# Altium PCB NANO-PCB.PcbDoc
Units mil, origin at the board's own origin, x right, y up, seen from the top; angles counter-clockwise.
Board outline 699.21 x 1699.21 mil, 4 copper layers (L1, L2, L3, L4), stack 61.585 mil thick; 26 components, 42 nets, 156 pads, 36 vias.
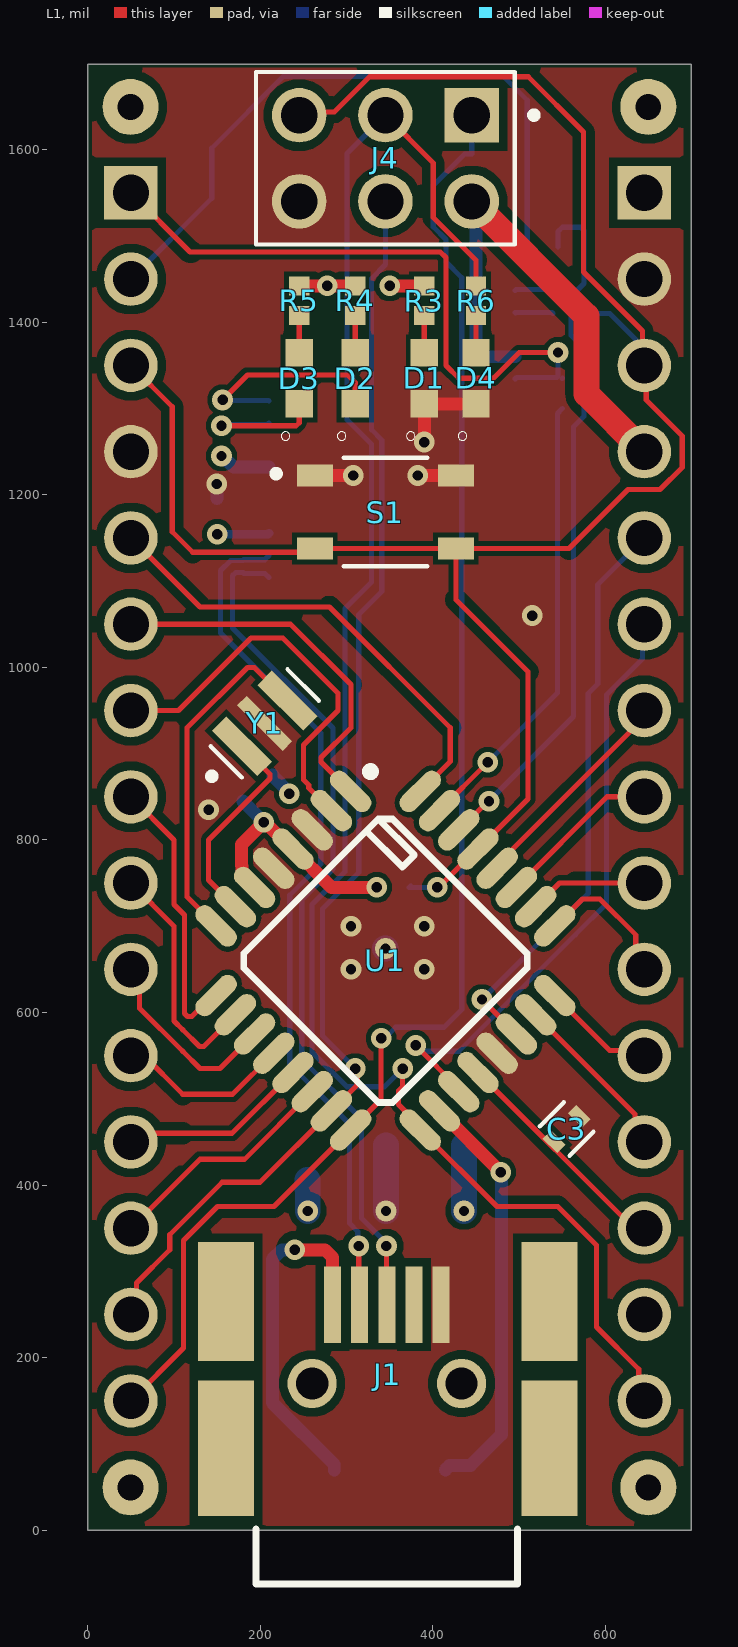
[diagram p0: L1 view]
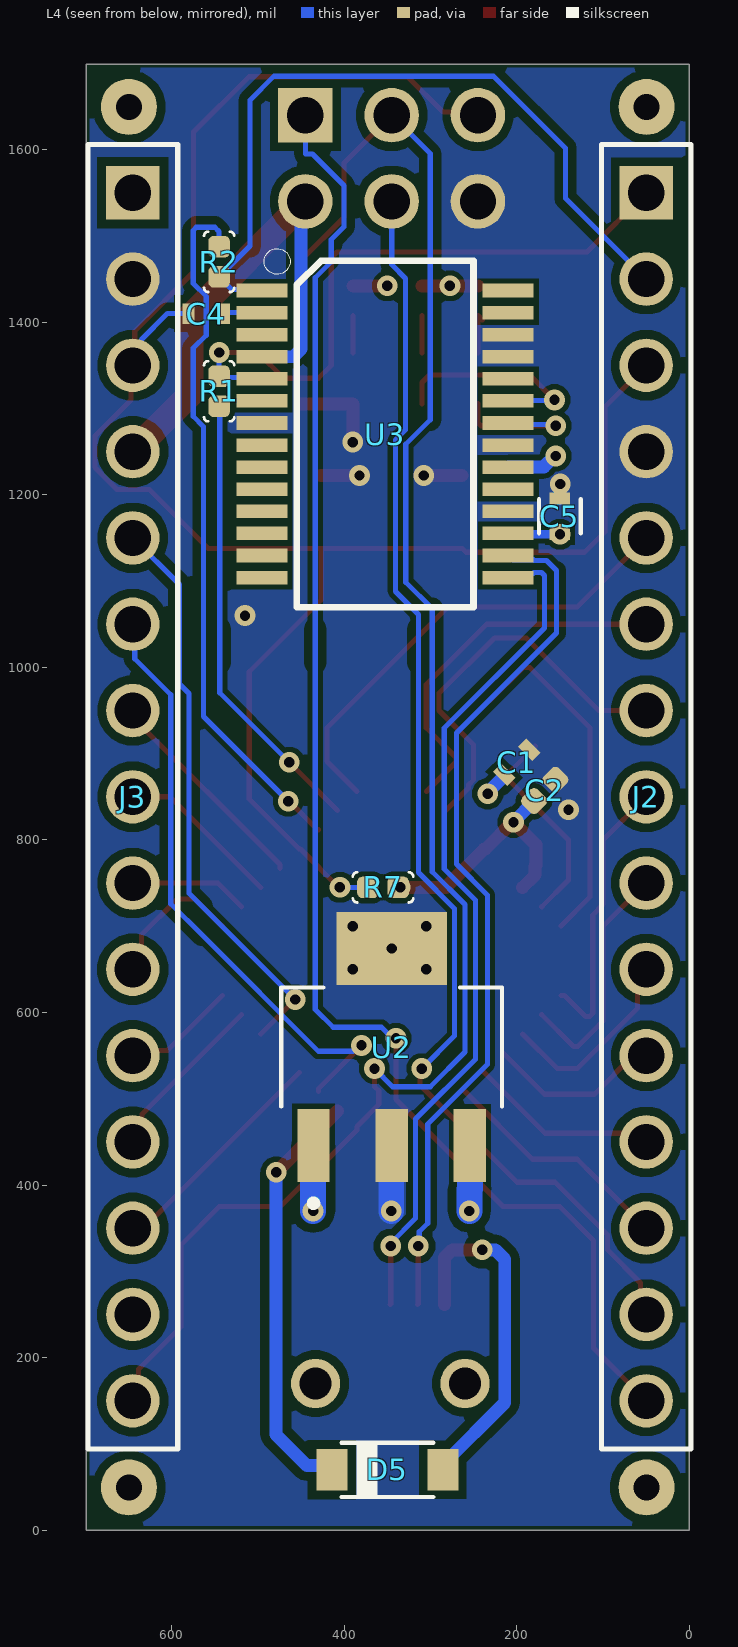
[diagram p1: L4 view, seen from below]
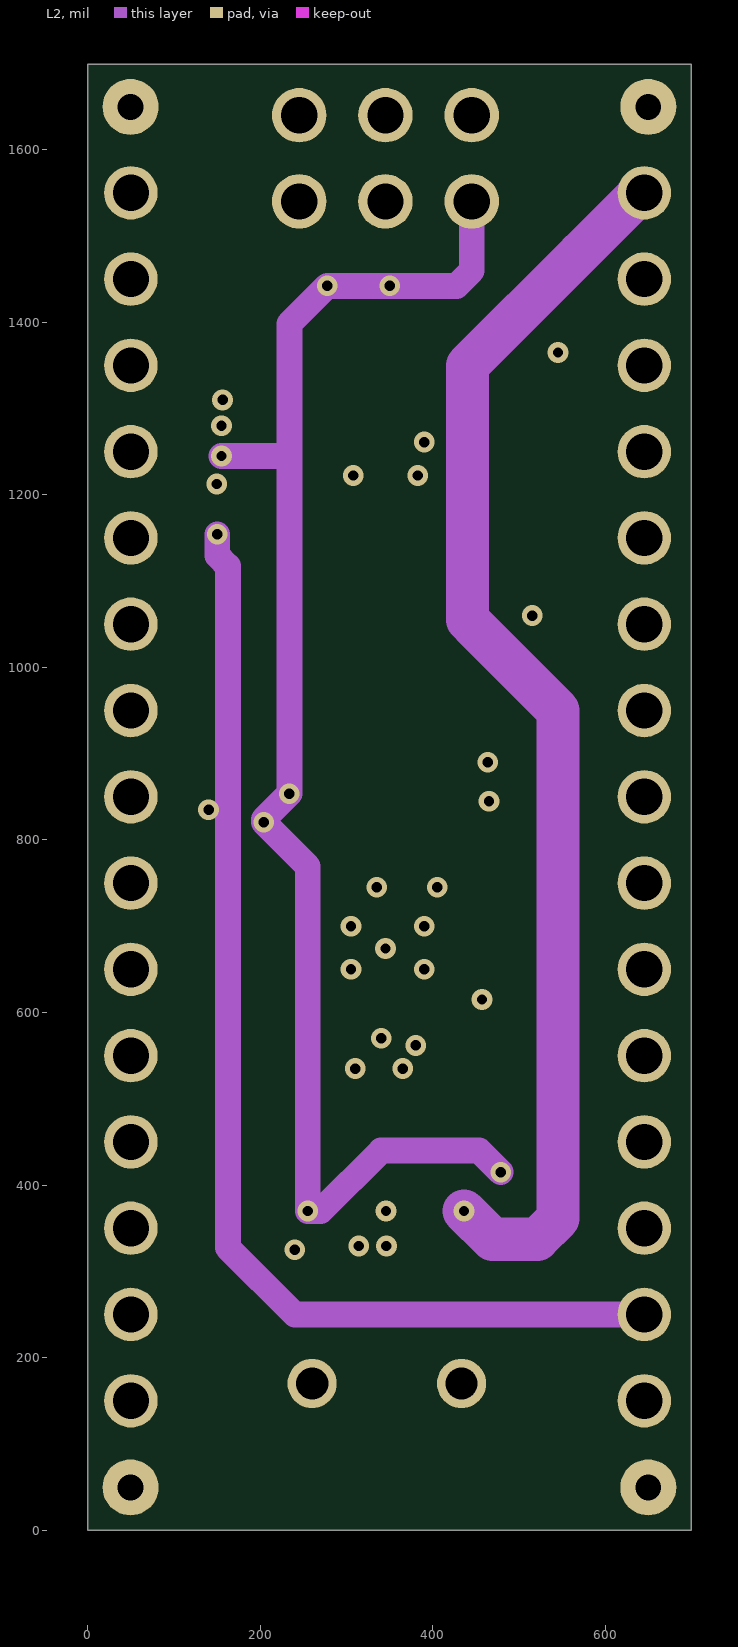
[diagram p2: L2]
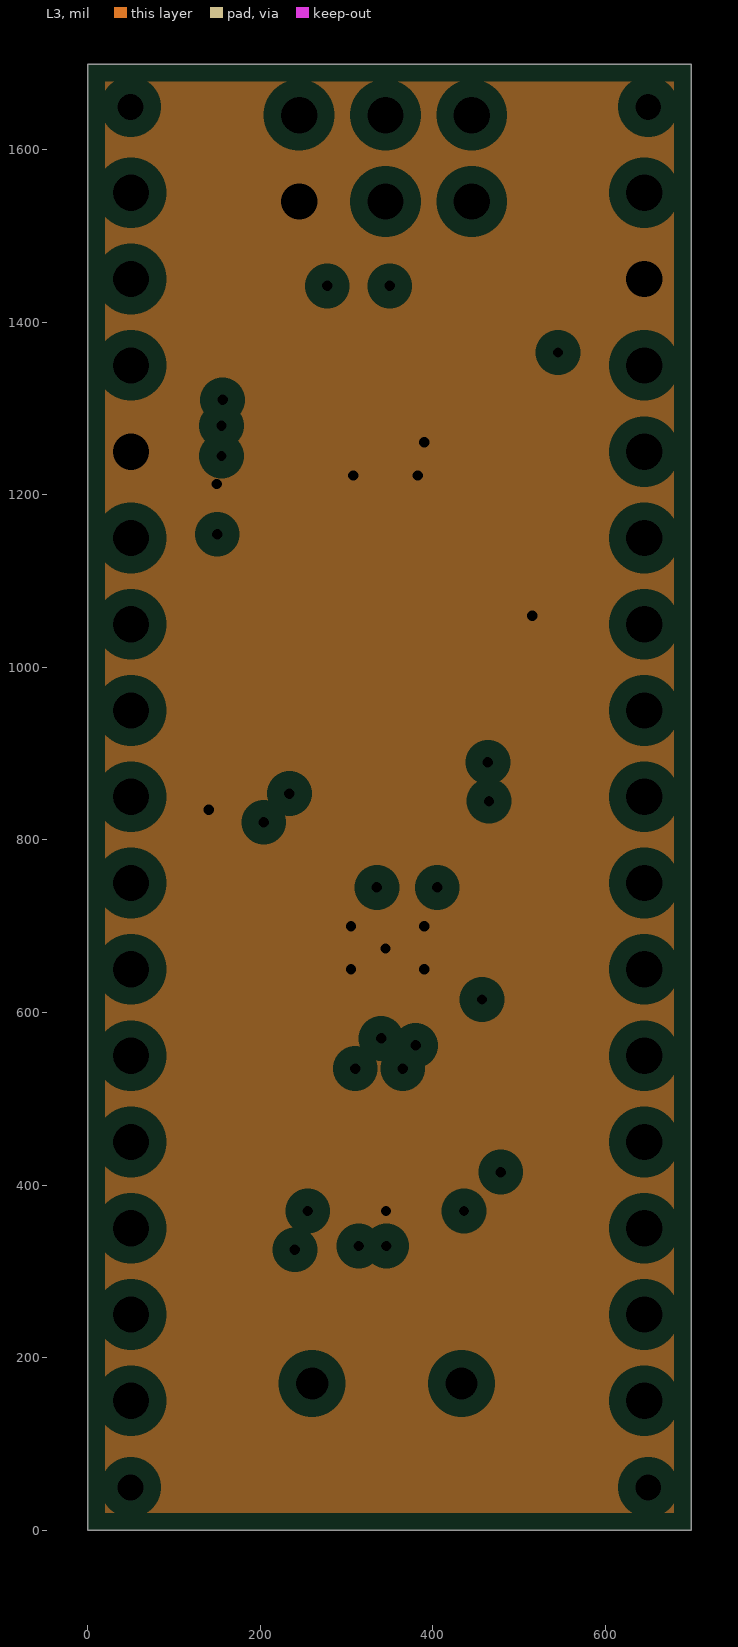
[diagram p3: L3, clearances drawn from the general rule]
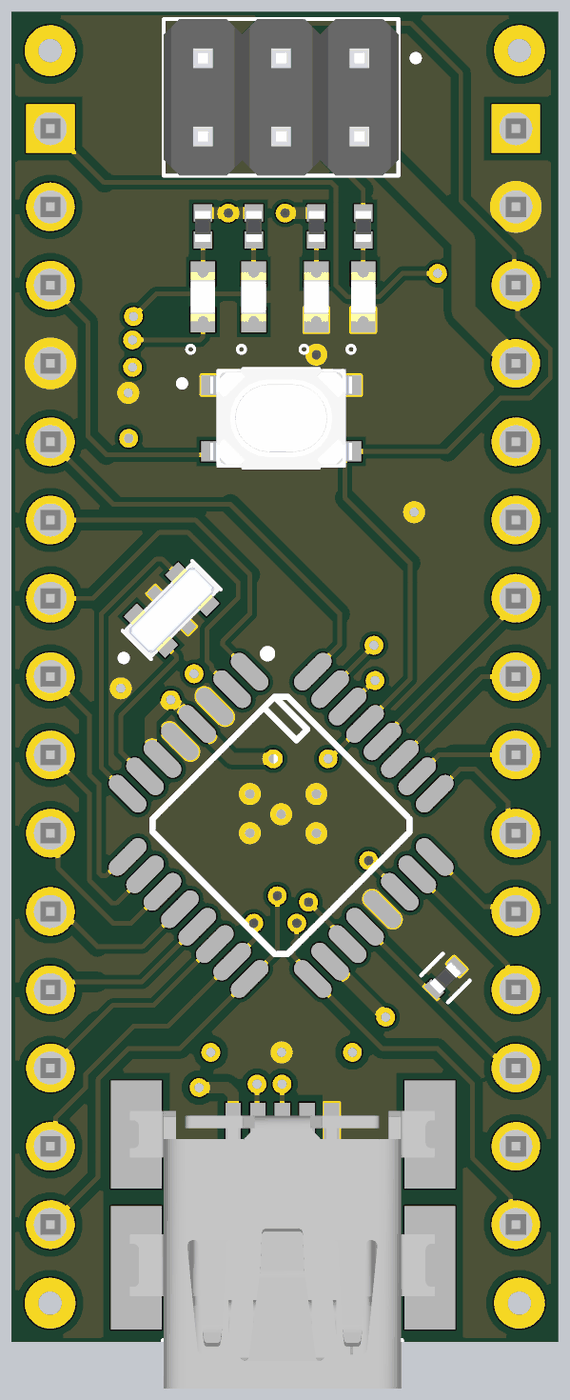
[diagram p4: 3D render of the assembled board from above, using the file's embedded part models]
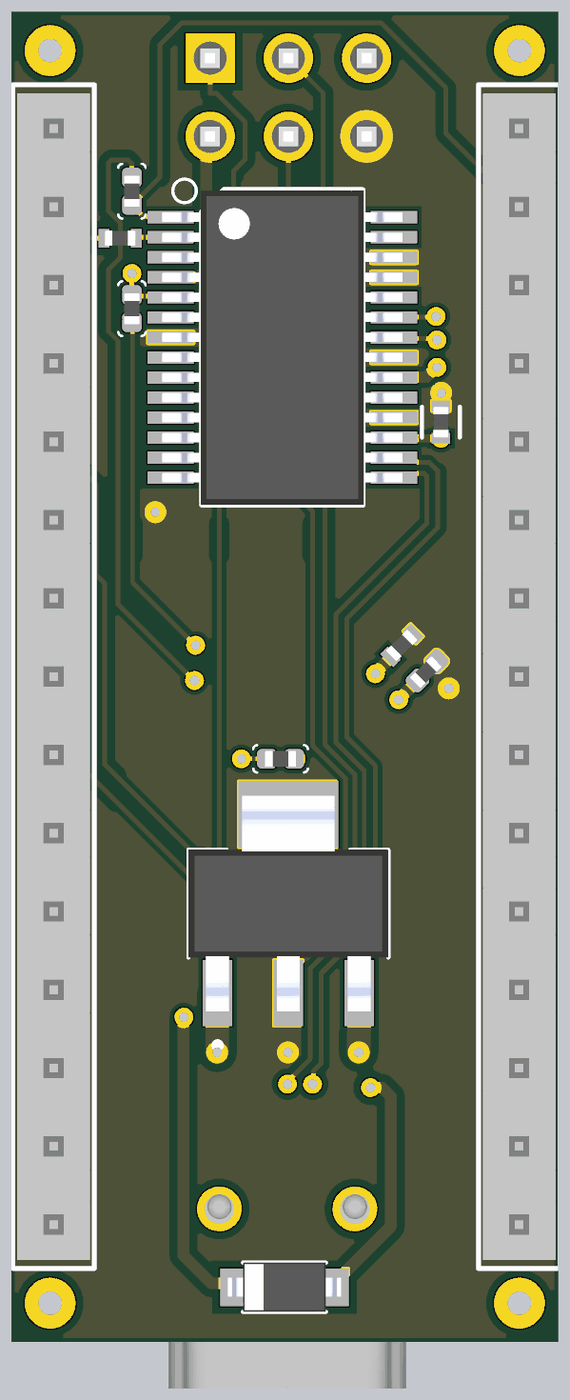
[diagram p5: 3D render of the assembled board from below, using the file's embedded part models]

## Layer stack, top to bottom
Top Solder: solder mask 0.4, Solder Resist, Dk 3.5
L1: signal copper 1.378
Dielectric 2: prepreg 3.913, PP-006, Dk 4.1
L2: signal copper 0.6
Dielectric 1: dielectric 49.803, FR-4, Dk 4.8
L3: plane copper 0.6, net GND
Dielectric 3: prepreg 3.913, PP-006, Dk 4.1
L4: signal copper 1.378
Bottom Solder: solder mask 0.4, Solder Resist, Dk 3.5

## Board outline
0,0 0,1699.21 699.21,1699.21 699.21,0

## Design rules (kind name [scope] priority, off if disabled: settings)
Clearance smaller [WithinRoom('FTDI')  or   WithinRoom('MCU')] p1: gap=6 ignorepadtopadclearanceinfootprint=FALSE
Clearance DIFF90 [InDifferentialPairClass('DIFF90')] p2: gap=8 ignorepadtopadclearanceinfootprint=FALSE
Clearance [All] p3: gap=10 ignorepadtopadclearanceinfootprint=FALSE
DiffPairsRouting [All] p1: maxlimit=10 minlimit=8 mostfreqgap=10 toplayer_maxgap=8 toplayer_prefgap=8 toplayer_minwidth=6.03 toplayer_maxwidth=6.03 toplayer_prefwidth=6.03 midlayer1_mingap=10 midlayer1_minwidth=15 midlayer1_maxwidth=15 midlayer1_prefwidth=15 bottomlayer_maxgap=8 bottomlayer_prefgap=8 bottomlayer_minwidth=6.03 bottomlayer_maxwidth=6.03 bottomlayer_prefwidth=6.03 maxuncoupledlength=500
HoleSize [All] p1: absolutevalues=TRUE maxlimit=248 minlimit=5.9 maxpercent=80.000 minpercent=20.000
MinimumSolderMaskSliver [All] p1: minsoldermaskwidth=3.15
PlaneClearance [All] p1: clearance=20
PlaneConnect [All] p1: pad.planeconnectstyle=Relief pad.reliefexpansion=20 pad.reliefentries=4 pad.reliefconductorwidth=20 pad.reliefairgap=10 via.planeconnectstyle=Direct via.reliefexpansion=20 via.reliefentries=4 via.reliefconductorwidth=10 via.reliefairgap=10
PolygonConnect [All] p1: connectstyle=Direct reliefconductorwidth=10 reliefentries=4 polygonreliefangle="90 Angle" airgapwidth=10
RoomDefinition MCU [False] p1: confinementstyle=ConfineIn formatcopy=TRUE lockcomponents=FALSE outline 565,395 110,395 110,1005 565,1005
RoomDefinition FTDI [False] p2: confinementstyle=ConfineIn formatcopy=TRUE lockcomponents=FALSE outline 120,1490 570,1490 570,1045 120,1045
RoutingVias [All] p1: holewidth=28 width=50 viastyle="Through Hole" minholewidth=28 minwidth=50 maxholewidth=28 maxwidth=50
SilkToSolderMaskClearance [IsPad] p1: minsilkscreentomaskgap=6 clearancetoexposedcopper=TRUE
SolderMaskExpansion [All] p1: expansion=2 istentingtop=FALSE
Width [All] p1: maxlimit=100 minlimit=6 preferedwidth=6 minimp=50.000000 maximp=50.000000 favimp=50.000000
24 further rules are at their usual default settings.

## Classes and differential pairs
differential pair class DIFF90: USB
differential pair USB: +USB_P -USB_N

## Components (designator, comment, footprint, x,y, rotation, side; value= is the part's Value field where it differs from the comment)
C1 "CC0402KRX7R7BB104" CAPC1005X55N 200,890 r135 bottom value=0.1uf
C2 "CERAMIC-10UF-6.3V-20%-X5R(0402)" C0402 167.63,857.37 r225 bottom value=10uF
C3 "CC0402KRX7R7BB104" CAPC1005X55N 555,465 r45 top value=0.1uf
C4 "CC0402KRX7R7BB104" CAPC1005X55N 560,1410 r180 bottom value=0.1uf
C5 "CC0402KRX7R7BB104" CAPC1005X55N 150,1175 r90 bottom value=0.1uf
D1 "LTST-C190GKT" LEDM1608X80 390,1335 r90 top
D2 "LTST-C190GKT" LEDM1608X80 310,1335 r90 top
D3 "LTST-C190GKT" LEDM1608X80 245,1335 r90 top
D4 "LTST-C190GKT" LEDM1608X80 450,1335 r90 top
D5 "MBR0520LT1G" SOD3716X135N 350,70 r180 bottom
J1 "67503-1020" 67503-1020 346.61,-62.28 r90 top
J2 "22032151" CONN15X1_22032151_MOL 50,1550 r270 bottom locked
J3 "22032151" CONN15X1_22032151_MOL 645,1550 r270 bottom locked
J4 "M20-9980346" HARWIN_M20-9980346 345,1590 r180 top
R1 "SMD-RES-1K-5%-1/16W(0402)" R0402 545,1320 r0 bottom value=1k
R2 "SMD-RES-1K-5%-1/16W(0402)" R0402 545,1470 r180 bottom value=1k
R3 "RT0402BRD07330RL" RESC1005X35N 390,1425 r90 top value=330
R4 "RT0402BRD07330RL" RESC1005X35N 310,1425 r90 top value=330
R5 "RT0402BRD07330RL" RESC1005X35N 245,1425 r90 top value=330
R6 "RT0402BRD07330RL" RESC1005X35N 450,1425 r90 top value=330
R7 "SMD-RES-1K-5%-1/16W(0402)" R0402 355,745 r90 bottom value=1k
S1 "SKRPABE010" SW_SKRPABE010 345,1180 r0 top
U1 "ATmega 328p AU" ATmega328P 345,660 r315 top
U2 "UA78M05IDCYR" SOT230P700X180-4N 345,560 r90 bottom
U3 "INTERFACE-FT232RL(SSOP28)" SSOP28-0.65-10.2X5.2MM 352.72,1270.43 r270 bottom
Y1 "CSTCE16M0V53-R0" OSC_CSTCE16M0V53-R0 205,935 r45 top

## Footprints (in the part's own frame and the unit in brackets; to place one, negate y for a bottom-side part, rotate by r counter-clockwise, add the part's x,y. Pads: shape width x height; smd on the part's side, far side on the other; paste and mask are expansions set on the pad)
67503-1020 [mm]
  rect 2.25x0.5 smd: 1(8.225,1.6) 2(8.225,0.8) 3(8.225,0) 4(8.225,-0.8) 5(8.225,-1.6)
  round 1.45 hole 0.95: 6(5.9,2.2) 7(5.9,-2.2)
  rect 4x1.651 smd: 8(3.995,-4.785) 11(3.995,4.74)
  rect 3.5x1.651 smd: 9(8.313,-4.785) 10(8.313,4.74)
  silkscreen extent 0,-3.85 1.62,3.85, body extent 0.07,-4.95 9.07,4.95, height 3.96
ATmega328P [mm] "CQFP, 32-Leads, Body 9,00x9,00mm, Pitch 0,80mm, IPC Medium Density"
  oval 1.5x0.55 smd: 1(-4.25,2.8) 2(-4.25,2) 3(-4.25,1.2) 4(-4.25,0.4) 5(-4.25,-0.4) 6(-4.25,-1.2) 7(-4.25,-2) 8(-4.25,-2.8) 17(4.25,-2.8) 18(4.25,-2) 19(4.25,-1.2) 20(4.25,-0.4) 21(4.25,0.4) 22(4.25,1.2) 23(4.25,2) 24(4.25,2.8)
  oval 0.55x1.5 smd: 9(-2.8,-4.25) 10(-2,-4.25) 11(-1.2,-4.25) 12(-0.4,-4.25) 13(0.4,-4.25) 14(1.2,-4.25) 15(2,-4.25) 16(2.8,-4.25) 25(2.8,4.25) 26(2,4.25) 27(1.2,4.25) 28(0.4,4.25) 29(-0.4,4.25) 30(-1.2,4.25) 31(-2,4.25) 32(-2.8,4.25)
  silkscreen extent -4.37,-3.1 3.1,3.75, body extent -3.5,-3.5 3.5,3.5, height 1.2
C0402 [mil]
  rrect50% 25x25 smd: 1(0,17.5) 2(0,-17.5)
  body extent -10,-22 10,18, height 22
CAPC1005X55N [mm]
  rect 0.35x0.6 smd: 1(-0.525,0) 2(0.525,0)
  body extent -0.5,-0.25 0.5,0.25, height 0.55
CONN15X1_22032151_MOL [mil]
  rect 62x62 / inner round 62 / far side rect 62x62 hole 42: 1(0,0)
  round 62 hole 42: 2(100,0) 3(200,0) 4(300,0) 5(400,0) 6(500,0) 7(600,0) 8(700,0) 9(800,0) 10(900,0) 11(1000,0) 12(1100,0) 13(1200,0) 14(1300,0) 15(1400,0)
  silkscreen extent -56,-52 1456,52, body extent -45,-47 1445,47, height 426
HARWIN_M20-9980346 [mm]
  rect 1.605x1.605 / inner round 1.605 / far side rect 1.605x1.605 hole 1.07: 1(-2.54,-1.27)
  round 1.605 hole 1.07: 2(-2.54,1.27) 3(0,-1.27) 4(0,1.27) 5(2.54,-1.27) 6(2.54,1.27)
  silkscreen extent -4.47,-2.54 3.81,2.54, body extent -3.81,-2.54 3.81,2.54, height 8.05
LEDM1608X80 [mm]
  rect 0.8x0.8 smd: A(0.75,0) C(-0.75,0)
  silkscreen extent -1.83,0.27 -1.57,0.53, body extent -0.8,-0.4 0.8,0.4, height 0.8
OSC_CSTCE16M0V53-R0 [mm]
  rect 0.6x1.9 smd: 1(-0.95,0) 3(0.95,0)
  rect 0.4x1.9 smd: 2(0,0)
  silkscreen extent -2.3,-0.65 1.6,0.65, body extent -1.6,-0.65 1.6,0.65, height 1
R0402 [mil]
  rrect50% 25x25 smd: 1(0,17.5) 2(0,-17.5)
  silkscreen extent -18,-35 18,35, body extent -10,-20 10,20, height 15
RESC1005X35N [mm]
  rect 0.56x0.6 smd: 1(-0.435,0) 2(0.435,0)
  body extent -0.5,-0.25 0.5,0.25, height 0.35
SOD3716X135N [mm]
  rect 0.91x1.22 smd: A(1.635,0) C(-1.635,0)
  silkscreen extent -1.35,-0.8 1.35,0.8, body extent -1.84,-0.8 1.84,0.8, height 1.35
SOT230P700X180-4N [mm]
  rect 2.15x0.95 smd: 1(-2.9,2.3) 2(-2.9,0) 3(-2.9,-2.3)
  rect 2.15x3.25 smd: 4(2.9,0)
  silkscreen extent -4.7,-3.25 1.75,3.25, body extent -3.5,-3.25 3.5,3.25, height 1.8
SSOP28-0.65-10.2X5.2MM [mm]
  rect 0.4x1.5 smd: 1(-4.225,-3.625) 2(-3.575,-3.625) 3(-2.925,-3.625) 4(-2.275,-3.625) 5(-1.625,-3.625) 6(-0.975,-3.625) 7(-0.325,-3.625) 8(0.325,-3.625) 9(0.975,-3.625) 10(1.625,-3.625) 11(2.275,-3.625) 12(2.925,-3.625) 13(3.575,-3.625) 14(4.225,-3.625) 15(4.225,3.625) 16(3.575,3.625) 17(2.925,3.625) 18(2.275,3.625) 19(1.625,3.625) 20(0.975,3.625) 21(0.325,3.625) 22(-0.325,3.625) 23(-0.975,3.625) 24(-1.625,3.625) 25(-2.275,3.625) 26(-2.925,3.625) 27(-3.575,3.625) 28(-4.225,3.625)
  silkscreen extent -5.46,-3.56 5.1,2.6, body extent -5.1,-3.9 5.1,3.9, height 2
SW_SKRPABE010 [mm]
  rect 1.05x0.65 smd: 1(-2.075,1.075) 2(2.075,1.075) 3(-2.075,-1.075) 4(2.075,-1.075)
  silkscreen extent -3.32,-1.6 1.23,1.6, body extent -2.3,-1.6 2.3,1.6, height 2.5

## Part data
C1 C3 C4 C5: "0.1 ÂµF Â±10% 16V Ceramic Capacitor X7R 0402 (1005 Metric)", Package="0402 Yageo", Check_prices=https://www.snapeda.com/parts/CC0402KRX7R7BB104/Yageo/view-part/?ref=eda, MF=Yageo, MP=CC0402KRX7R7BB104, SnapEDA_Link=https://www.snapeda.com/parts/CC0402KRX7R7BB104/Yageo/view-part/?ref=snap
C2: "10 ÂµF Â±20% 6.3V Ceramic Capacitor X5R 0402 (1005 Metric)", Package="0402 Yageo", Check_prices=https://www.snapeda.com/parts/CC0402MRX5R5BB106/Yageo/view-part/?ref=eda, MF=Yageo, MP=CC0402MRX5R5BB106, SnapEDA_Link=https://www.snapeda.com/parts/CC0402MRX5R5BB106/Yageo/view-part/?ref=snap
D1 D2 D3 D4: "Green 1.6 x 0.8 x 0.8 mm 130Â° Water Clear 6 mcd 2.1 V SMT LED", Package=None, Availability=Unavailable, MP=LTST-C190GKT, Price=None
D5: "Diode Schottky 20 V 500mA Surface Mount SOD-123", Package="SOD-123-2 ON Semiconductor", Check_prices=https://www.snapeda.com/parts/MBR0520LT1G/Onsemi/view-part/?ref=eda, MF="ON Semiconductor", MP=MBR0520LT1G, SnapEDA_Link=https://www.snapeda.com/parts/MBR0520LT1G/Onsemi/view-part/?ref=snap
J1: "Conn Data USB Mini-B SMT Rt Angle Solder Tabs On-The-Go PCB Pegs LF", Package=None, Check_prices=https://www.snapeda.com/parts/67503-1020/Molex/view-part/?ref=eda, MF=Molex, MP=67503-1020, SnapEDA_Link=https://www.snapeda.com/parts/67503-1020/Molex/view-part/?ref=snap
J2 J3 J4: Package=None, Availability=Unavailable, Price=None
  J2 J3: MP=22032151
  J4: MP=M20-9980346
R1 R2 R7: "301010006", Package=None, Availability=Unavailable, MF="{'manufacturer': u'YAGEO'}", MP=RC0402JR-071KL, Price=None
R3 R4 R5 R6: "330 Ohms Â±0.1% 0.063W, 1/16W Chip Resistor 0402 (1005 Metric) Thin Film", Package="1005 Yageo", Check_prices=https://www.snapeda.com/parts/RT0402BRD07330RL/Yageo/view-part/?ref=eda, MF=Yageo, MP=RT0402BRD07330RL, SnapEDA_Link=https://www.snapeda.com/parts/RT0402BRD07330RL/Yageo/view-part/?ref=snap
S1: "Switch Tactile N.O. SPST Button J-Bend 0.05A 16VDC 1.57N SMD Automotive T/R", Package=None, Check_prices=https://www.snapeda.com/parts/SKRPABE010/ALPS/view-part/?ref=eda, MF=ALPS, MP=SKRPABE010, SnapEDA_Link=https://www.snapeda.com/parts/SKRPABE010/ALPS/view-part/?ref=snap
U1: library part ATmega328p
U2: "500-mA, 30-V, linear voltage regulator", Package="SOT-223-4 Texas Instruments", Check_prices=https://www.snapeda.com/parts/UA78M05IDCYR/Texas+Instruments/view-part/?ref=eda, MF="Texas Instruments", MP=UA78M05IDCYR, SnapEDA_Link=https://www.snapeda.com/parts/UA78M05IDCYR/Texas+Instruments/view-part/?ref=snap
U3: "USB-Ð¼Ð¾ÑÑ‚, Ð¸Ð½Ñ‚ÐµÑ€Ñ„ÐµÐ¹Ñ USB Ðº UART USB 2.0 UART 28-SSOP", Package="SSOP-28 FTDI", Availability="Not in stock", Check_prices=https://www.snapeda.com/parts/FT232RL/FTDI%252C+Future+Technology+Devices+International+Ltd/view-part/?ref=eda, MF="FTDI, Future", MP=FT232RL, Price=None, SnapEDA_Link=https://www.snapeda.com/parts/FT232RL/FTDI%252C+Future+Technology+Devices+International+Ltd/view-part/?ref=snap
Y1: "16 MHz Ceramic Resonator Built in Capacitor 15 pF Â±0.3% -20Â°C ~ 80Â°C Surface Mount", Package=None, Check_prices=https://www.snapeda.com/parts/CSTCE16M0V53-R0-/Murata/view-part/?ref=eda, MF=Murata, MP=CSTCE16M0V53-R0-, SnapEDA_Link=https://www.snapeda.com/parts/CSTCE16M0V53-R0-/Murata/view-part/?ref=snap

## Free pads (board coordinates)
  round 64.96 hole 30: 4(49.61,49.61) 4(49.61,1649.61) 4(649.61,49.61) 4(649.61,1649.61)

## Via types
v1: diameter 24, hole 12, L1 to L4, 36 vias

## Nets (pads, with @x,y where several pads share a name; then routed paths per layer and width w, separated by ;. In a path a pad name is that pad's centre, name@x,y a point inside that pad or via, vN(x,y) a via of type N, cw(c..) or ccw(c..) an arc to the next point about the centre after c; other vN are vias at no path point)
+3V3: C5.1 J3.14 U3.17 | length 1407
  L2 w30: v1(150,1154.33) 150,1129.85 162.43,1117.43 162.43,1105 162.43,327.57 240,250 J3.14
  L4 w10: v1(150,1154.33) 209.06,1154.33 U3.17
+5: C1.1 C2.2 D5.C J3.4 J4.2 R3.2 R4.2 R5.2 R7.2 U1.4 U1.6 U1.18 U2.3 U3.4 U3.20 | length 3333.4
  L1 w15: U1.6 178.78,759.4 178.78,769.54 178,770.33 178,794.58 v1(203.88,820.46) 205.34,820.46 236.35,789.45 U1.4 282.27,745 v1(335,745) ; R5.2 v1(277.5,1442.13) R4.2 ; v1(350,1442.13) R3.2 ; U1.18 v1(478.64,415)
  L1 w30: J4.2 578,1407 578,1317 J3.4
  L2 w30: v1(155,1245) 228.65,1245 233.65,1240 ; J4.2 445,1459.7 427.43,1442.13 v1(350,1442.13) v1(277.5,1442.13) 233.65,1398.28 233.65,1240 ; v1(478.64,415) 453.64,440 340,440 270,370 v1(255,370) 255,769.34 v1(203.88,820.46) 203.88,823.84 v1(233.65,853.62) 233.65,1240 ; J3.4@638.88,1256.12 J3.4
  L4 w15: v1(155,1245) 156.06,1245 168.64,1232.42 209.63,1232.42 U3.20 ; C2.2 180,844.67 v1@203.88,820.79 ; C1.1 214.36,875.13 214.36,874.27 233.65,854.98 v1(233.65,853.62) ; D5.C 419.37,75 443.37,75 479.27,110.91 479.27,414.37 v1(478.64,415) ; J4.2 450,1535 450,1368.79 458.79,1360 U3.4
  L4 w30: U2.3@254.45,405.83 254.45,395.55 255,395 v1(255,370)
A0: J3.12 U1.23 | length 199.6
  L1 w6: U1.23 634.28,482.07 634.28,460.72 J3.12
A1: J3.11 U1.24 | length 132.6
  L1 w6: U1.24 605,555.9 639.1,555.9 J3.11
A2: J3.10 U1.25 | length 168.1
  L1 w6: U1.25 541.99,700.37 573.33,731.7 593.3,731.7 635,690 635,660 J3.10
A3: J3.9 U1.26 | length 137.5
  L1 w6: U1.26 546.56,750.2 565,750.2 594.07,750.2 594.27,750 J3.9
A4: J3.8 U1.27 | length 191.8
  L1 w6: U1.27 601.81,850 J3.8
A5: J3.7 U1.28 | length 253.5
  L1 w6: U1.28 474.45,771.42 645,941.96 J3.7
A6: J3.6 U1.19 | length 711.1
  L1 w6: v1(380,561.85) 380,561.59 429.91,511.68 U1.19
  L4 w6: v1(380,561.85) 383.15,561.85 390,555 430,555 565,690 601,726 601,968.23 642.77,1010 642.77,1047.77 J3.6
A7: J3.5 U1.22 | length 669.4
  L1 w6: v1(456.81,615) U1.22
  L4 w6: v1(456.81,615) 565,723.19 580,738.19 580,969.85 591,980.85 591,1096 J3.5
AREF: C3.1 J3.13 U1.20 | length 267.6
  L1 w6: U1.20 632.73,350 J3.13
D0/RX: R2.1 U1.30 | length 819.4
  L1 w6: U1.30 430.82,811.72 464.09,845 v1(465,845)
  L4 w6: v1(465,845) 563,943 563,1278.93 575,1290.93 575,1370 560,1385 560,1430 575,1445 575,1506.49 571.49,1510 550,1510 545,1505 R2.1
D1/TX: R1.1 U1.31 | length 525
  L1 w6: U1.31 v1(463.64,890)
  L4 w6: v1(463.64,890) 544.25,970.61 544.25,1005 544.25,1045 544.25,1294.25 R1.1@550,1300
D2: J2.5 U1.32 | length 549.2
  L1 w6: J2.5 130,1070 280,1070 420,930 420,890.9 U1.32
D3: J2.6 U1.1 | length 436.2
  L1 w6: J2.6 235,1050 305,980 305,930 270.43,895.43 270.43,890.46 U1.1
D4: J2.7 U1.2 | length 467.3
  L1 w6: J2.7 105,950 189,1034 226,1034 290,970 290,950 250,910 250,869.7 256,863.7 256,860.36 U1.2
D5: J2.8 U1.9 | length 324.9
  L1 w6: J2.8 100,800 100,725 112.01,712.99 112.01,599.01 115.53,595.5 120.5,595.5 144.63,619.63 U1.9
D6: J2.9 U1.10 | length 279.1
  L1 w6: J2.9 100.01,699.99 100.01,589.99 110,580 129.34,560.66 134.31,560.66 U1.10
D7: J2.10 U1.11 | length 228
  L1 w6: J2.10 60,640 60,605 110,555 130,535 153.19,535 U1.11
D8: J2.11 U1.12 | length 203.9
  L1 w6: J2.11 65.15,550 110,505.15 167.88,505.15 U1.12
D9: J2.12 U1.13 | length 221.2
  L1 w6: J2.12 60,460 110,460 167.27,460 U1.13
D10: J2.13 U1.14 | length 275.7
  L1 w6: J2.13 110,410 130,430 181.81,430 U1.14
D11/MOSI: J2.14 J4.4 U1.15 | length 1485.9
  L1 w6: J2.14 56.49,256.49 56.49,286.49 95,325 95,342.41 155.89,403.3 199.65,403.3 U1.15 312.36,516 312.36,537.64 v1@310,540
  L4 w6: v1(310,535) 272.02,572.98 272.02,720.22 314.05,762.25 314.05,1005 314.05,1045 314.05,1061.42 340.68,1088.05 340.68,1263.6 329,1275.28 329,1450.82 345,1466.82 J4.4
D12/MISO: J2.15 J4.1 U1.16 | length 1759.3
  L1 w6: J2.15 111,211 111,335.78 150.22,375 215.9,375 U1.16 340,499.1 v1(340,570)
  L4 w6: v1(340,570) 344,570 356.85,582.85 412.7,582.85 433.5,603.65 433.5,1005 433.5,1045 433.5,1451.5 415,1470 415,1490 415,1495.99 400.41,1510.58 400.41,1558.47 436.93,1595 445,1595 J4.1
D13/SCK: J3.15 J4.3 R6.2 U1.17 | length 2062.5
  L1 w6: J4.3 400.41,1584.59 400.41,1521.53 450,1471.93 R6.2 ; v1(365,535) 364.78,534.78 364.78,514 360,509.22 360,493.3 385.37,467.93 U1.17 474.1,375 544.78,375 589.53,330.25 589.53,235.47 638.51,186.49 638.51,156.49 J3.15
  L4 w6: J4.3 300.41,1595.41 300.41,1286.9 328.68,1258.63 328.68,1098.68 298.05,1068.05 298.05,763.22 260.02,725.19 260.02,554.37 300.4,514 344,514 v1(365,535)
GND: C1.2 C2.1 C3.2 C5.2 D1.C D4.C J1.5 J2.4 J3.2 J4.6 S1.1 S1.2 U1.3 U1.5 U1.21 U2.2 U2.4 U3.7 U3.18 U3.21 U3.25 U3.26 Y1.2 | length 286.4
  L1 w15: S1.1 v1(307.68,1222.32) ; v1(382.32,1222.32) S1.2 ; v1(390,1261.1) D1.C D4.C
  L4 w15: v1(149.57,1212.45) 149.79,1212.24 149.79,1195.88 C5.2
  L4 w30: U2.4@344.45,674.17 v1(345,674.17) ; v1(345.55,370) U2.2@345.55,445.83
  other v1: 305,650 390,650 305,700 390,700 140,835 515,1060
LED_RX: D2.A R4.1 | length 43.3
  L1 w6: D2.A R4.1
LED_TX: D3.A R5.1 | length 50.4
  L1 w6: R5.1@240,1402.87 R5.1 D3.A
NetC4_2: C4.2 U3.2 | length 44.7
  L4 w6: U3.2@495.69,1410.93 U3.2 538.15,1411.18 C4.2
NetD1_A: D1.A R3.1 | length 43.3
  L1 w6: D1.A R3.1
NetD2_C: D2.C U3.23 | length 248.2
  L1 w6: v1(156.23,1309.97) 185,1338.75 301.47,1338.75 310,1330.22 D2.C
  L4 w6: v1(156.23,1309.97) 156.81,1309.4 209.42,1309.4 U3.23
NetD3_C: D3.C U3.22 | length 169.8
  L1 w6: v1(155,1280) 241.49,1280 245,1283.51 D3.C
  L4 w6: v1(155,1280) 156.61,1281.61 208.39,1281.61 U3.22
NetD4_A: D4.A R6.1 | length 43.3
  L1 w6: D4.A R6.1
NetU1_7: U1.7 Y1.1 | length 241.7
  L1 w6: U1.7 140,753.64 140,800 211.07,871.07 211.07,876.04 Y1.1
NetU1_8: U1.8 Y1.3 | length 405
  L1 w6: U1.8 115,734.1 115,930 185,1000 192.89,1000 Y1.3
REST: C4.1 J2.3 J3.3 J4.5 R7.1 S1.3 S1.4 U1.29 | length 2273.3
  L1 w6: J2.3 97.86,1302.14 97.86,1157.14 121.57,1133.43 141.2,1133.43 141.3,1133.33 258.96,1133.33 S1.3 S1.4 ; J4.5 248.66,1643.66 285.59,1643.66 326.53,1684.59 510.41,1684.59 574.64,1620.36 574.64,1458.13 642.77,1390 642.77,1352.23 J3.3 647.23,1347.77 647.23,1310 689,1268.23 689,1231.77 663.23,1206 626,1206 557.68,1137.68 S1.4 ; v1(405,745) 406.36,745 450.82,789.45 U1.29 510.04,847.31 510.04,995 426.69,1078.34 S1.4
  L4 w6: R7.1@374.27,746.77 R7.1 v1(405,745) ; C4.1 605,1410 635,1380 635,1360 J3.3
RX: J2.2 R2.2 U3.1 | length 877.8
  L4 w6: J2.2 143.62,1543.62 143.62,1601.69 226.93,1685 481.57,1685 509.3,1657.27 509.3,1488.2 R2.2 530.45,1437.95 496.61,1437.95 U3.1
TX: J2.1 R1.2 U3.5 | length 748.5
  L1 w6: J2.1 118.51,1481.49 120,1481.49 408.51,1481.49 415,1475 415,1350 430,1335 470.06,1335 500.06,1365 v1(545,1365)
  L4 w6: U3.5 496.98,1335.95 543.45,1335.95 R1.2 v1(545,1365) ; R1.2@549.7,1334.7 R1.2@550,1335
USB_N: J1.2 U3.16 | length 1010.6
  L1 w6.03: v1(314.12,329.41) 314.12,262.54 J1.2
  L4 w6.03: U3.16 205.14,1124.83 180.88,1124.83 179.96,1123.9 165.62,1123.9 153.87,1112.15 153.87,1039.94 270,923.81 270,772 233.98,735.98 233.98,540.07 303.25,470.79 303.25,355.66 312.96,345.96 312.96,330.56 v1(314.12,329.41)
USB_P: J1.3 U3.15 | length 994.6
  L1 w6.03: v1(346.12,329.41) 346.12,262.03 J1.3
  L4 w6.03: U3.15 205.14,1108.95 180.88,1108.95 179.96,1109.87 171.43,1109.87 167.9,1106.34 167.9,1045.75 284.03,929.62 284.03,766.19 248.01,730.17 248.01,545.88 317.28,476.61 317.28,361.48 346.12,332.64 v1(346.12,329.41)
Vin: J3.1 U2.1 | length 1528.5
  L2 w40: J3.1@635,1545 640,1550 J3.1
  L2 w50: v1(436.1,370) 468.97,337.13 521.03,337.13 545,361.1 545,395 545,950 490,1005 450,1045 440,1055 440,1350 570,1480 J3.1@635,1545
  L4 w30: v1(436.1,370) U2.1@436.1,445.83
Vusb: D5.A J1.1 | length 406.2
  L1 w15: v1(240,325) 274.84,325 283.62,316.21 J1.1
  L4 w15: v1(240,325) 225,325 213.96,313.96 213.96,147.78 285.63,76.1 D5.A
pads on no net: J1.4 J1.6 J1.7 J1.8 J1.9 J1.10 J1.11 U3.3 U3.6 U3.8 U3.9 U3.10 U3.11 U3.12 U3.13 U3.14 U3.19 U3.24 U3.27 U3.28

## Polygon pours and split planes (outlines as drawn)
GND on L4 "NONET_L-01_P-001" (solid, pour order 1): 5,1695 695,1695 695,5 5,5
GND on L1 "NONET_L-01_P-001" (solid, pour order 0): 5,1695 690,1695 690,5 5,5
GND on L3 (split plane): 679.12,20.1 20.1,20.1 20.1,1679.12 679.12,1679.12

## Silkscreen, mask and mechanical layers (free items; w line width, h text height)
Mechanical 1:
  the board outline again, w10